# Altium PCB PCB1.PcbDoc
Units mil, origin at the board's own origin, x right, y up, seen from the top; angles counter-clockwise.
Board outline 4075 x 3830 mil, 2 copper layers (Top Layer, Bottom Layer); 91 components, 64 nets, 396 pads, 22 vias.
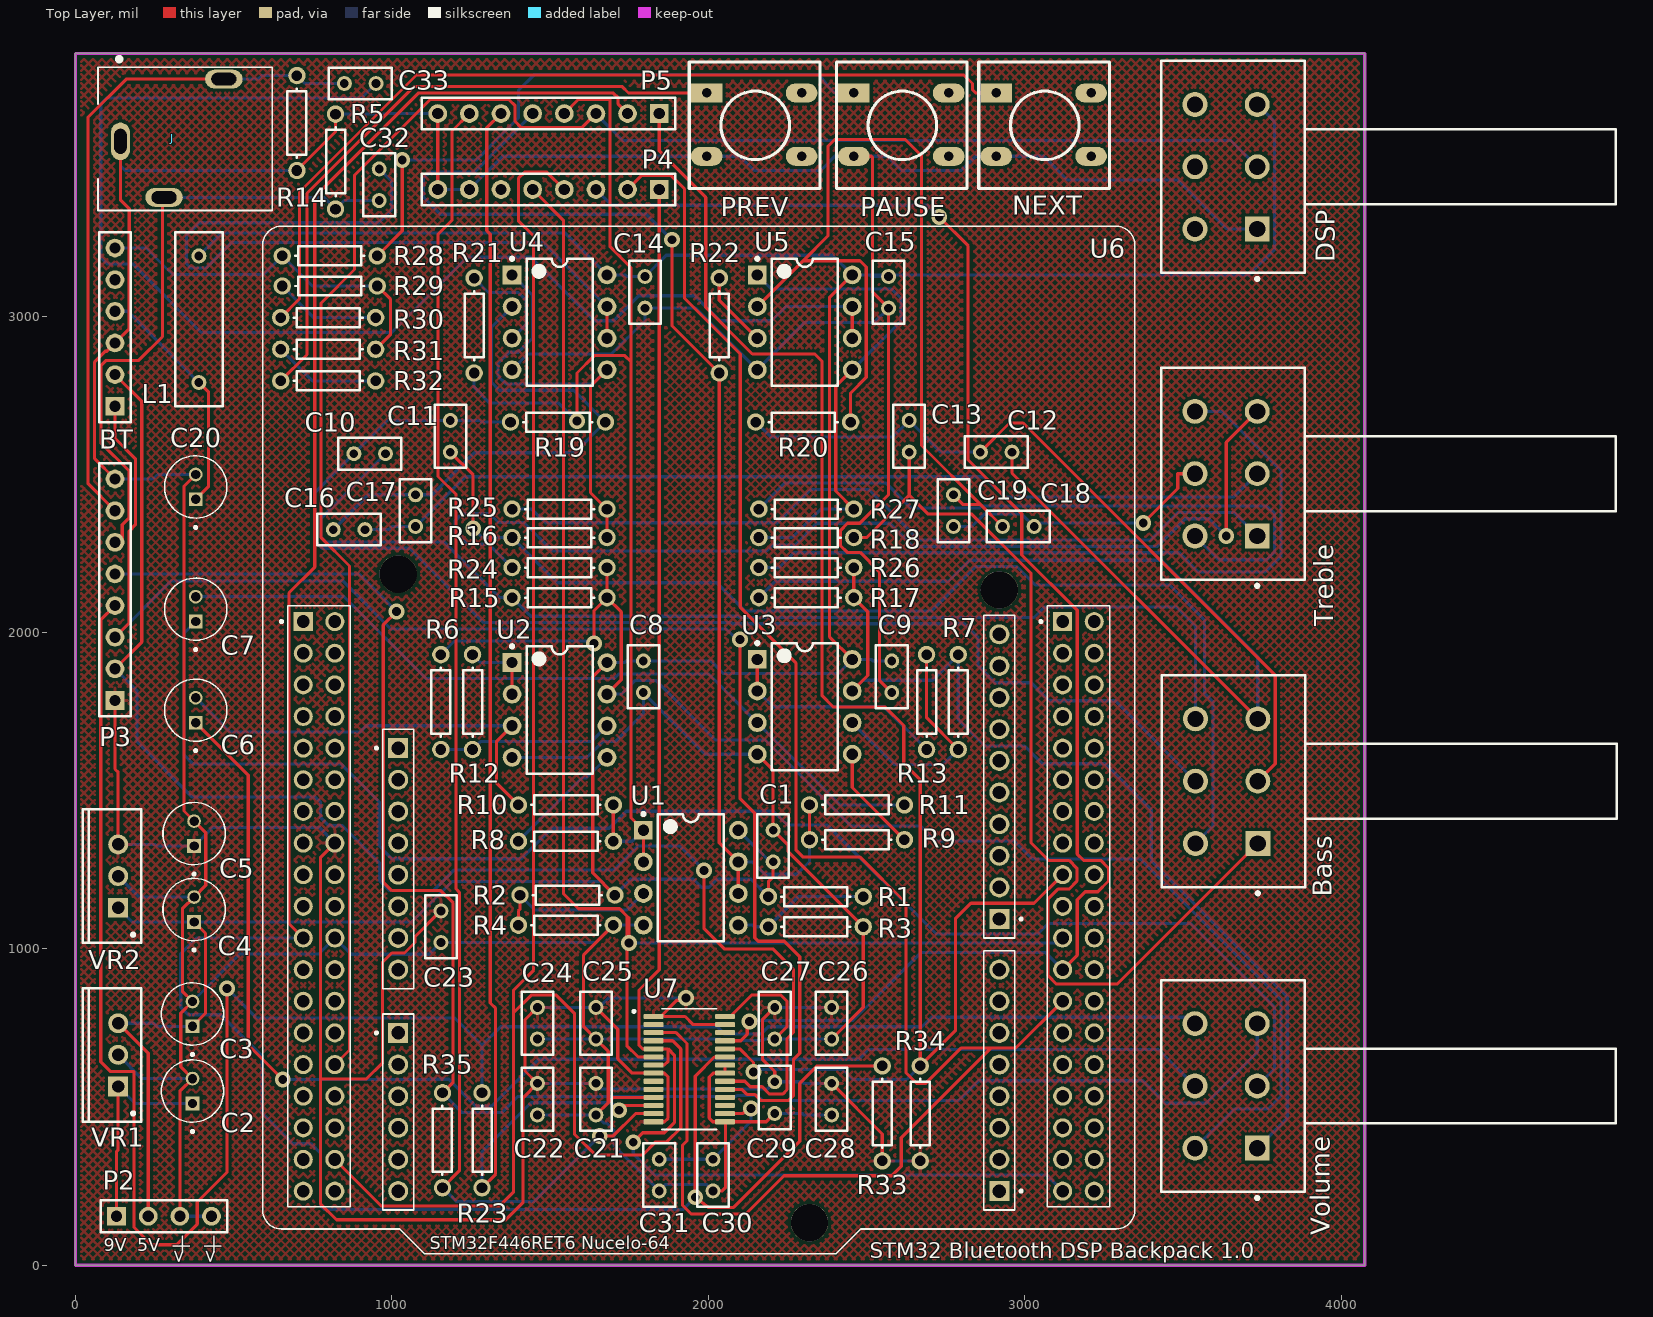
[diagram p0: Top Layer view]
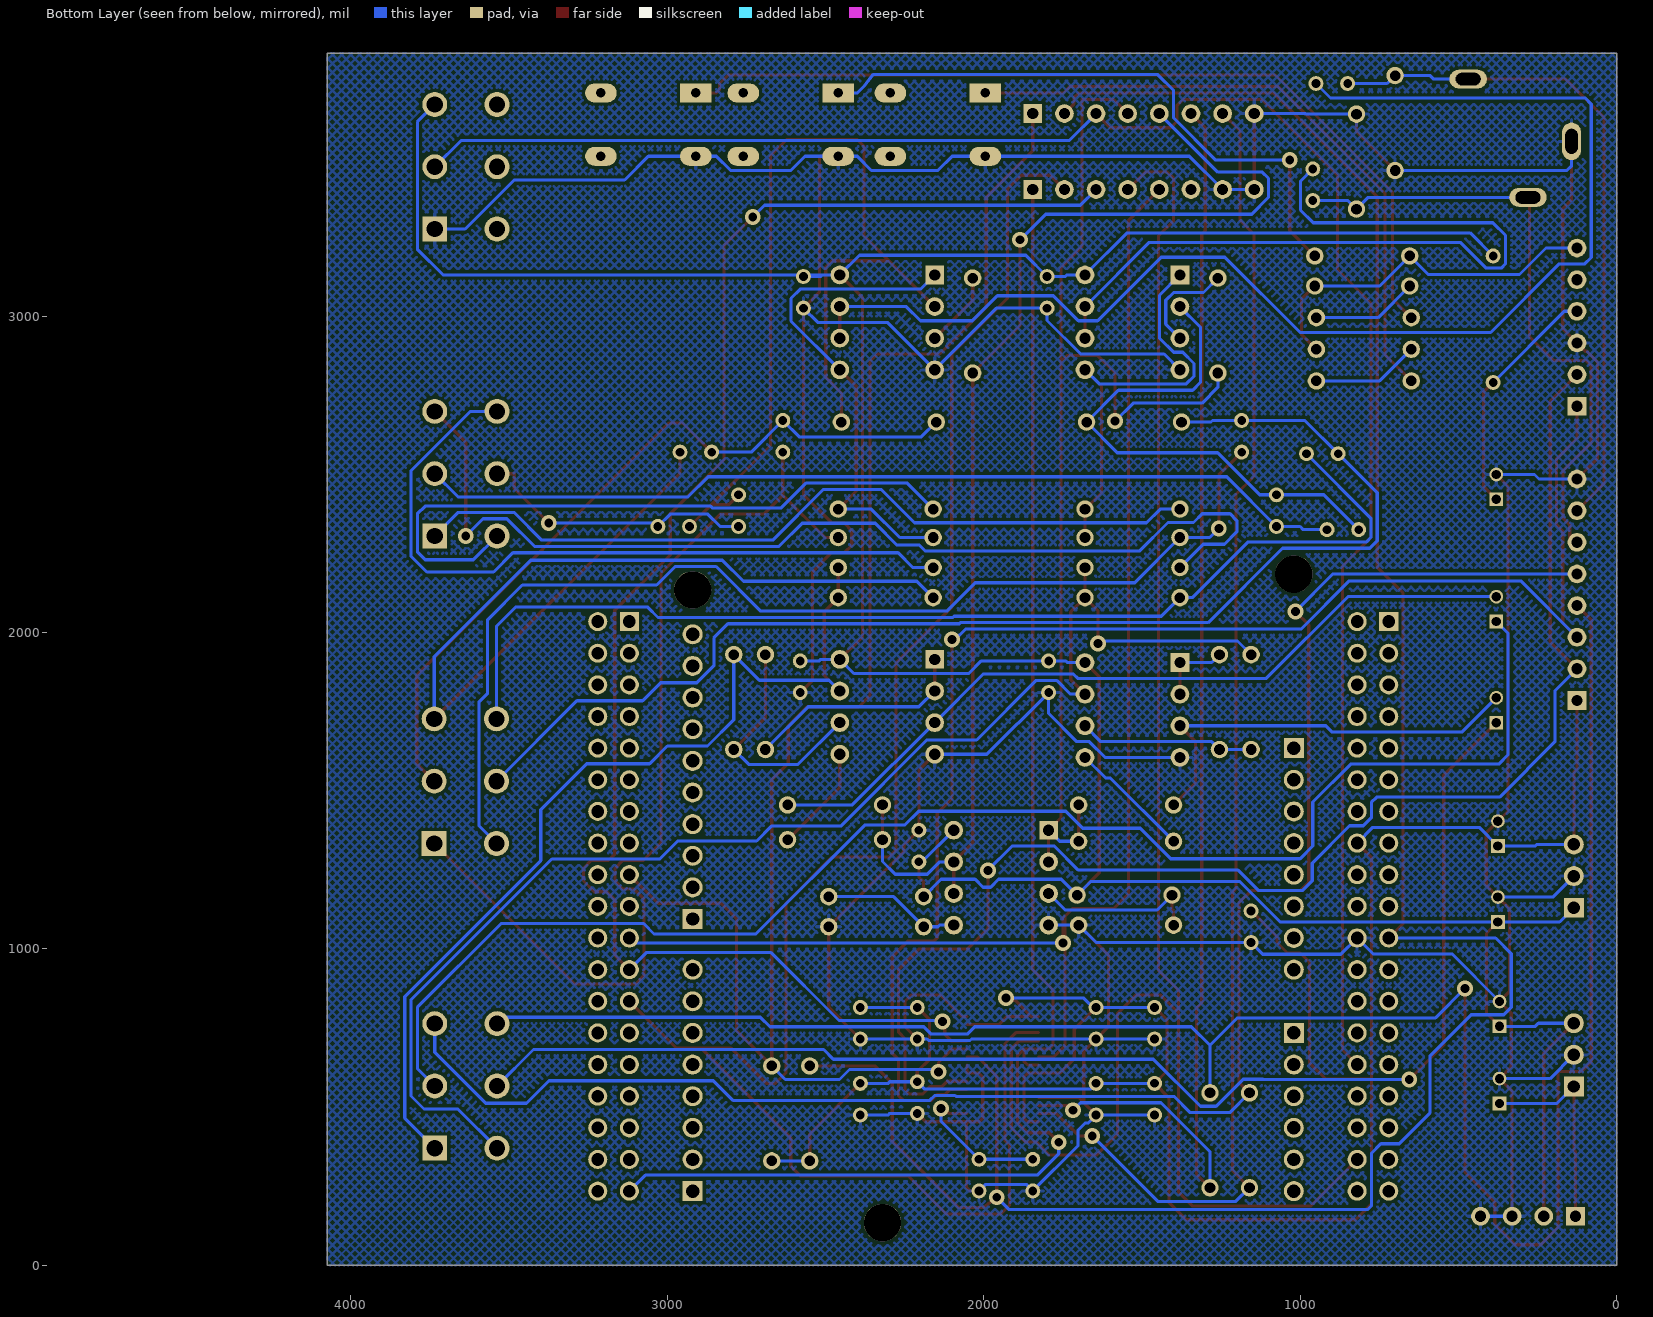
[diagram p1: Bottom Layer view, seen from below]

## Layer stack, top to bottom
Top Solder: solder mask 0.4, Solder Resist, Dk 3.5
Top Layer: signal copper 1.4
Dielectric 1: dielectric 12.6, FR-4, Dk 4.8
Bottom Layer: signal copper 1.4
Bottom Solder: solder mask 0.4, Solder Resist, Dk 3.5

## Board outline
0,0 0,3830 4075,3830 4075,0

## Design rules (kind name [scope] priority, off if disabled: settings)
Clearance [All] p1: gap=10 ignorepadtopadclearanceinfootprint=FALSE except(0: Arc-Hole Track-Hole SMDPad-Hole THPad-Hole Via-Hole Fill-Hole Poly-Hole Region-Hole Text-Hole)
PolygonConnect [All] p1: connectstyle=Relief reliefconductorwidth=10 reliefentries=4 polygonreliefangle="90 Angle" airgapwidth=10
RoutingVias [All] p1: holewidth=28 width=50 viastyle="Through Hole" minholewidth=28 minwidth=50 maxholewidth=28 maxwidth=50
SolderMaskExpansion [All] p1: expansion=4 istentingtop=FALSE
Width [All] p1: maxlimit=10 minlimit=10 preferedwidth=10
30 further rules are at their usual default settings.

## Classes and differential pairs
component class Volume_Tone_Control: Bass C6 C7 C8 C9 C10 C11 C12 C13 C14 C15 C16 C17 C18 C19 C32 C33 J R5 R6 R7 R8 R9 R10 R11 R12 R13 R14 R15 R16 R17 R18 R19 R20 R21 R22 R23 R24 R25 R26 R27 Treble U2 U3 U4 U5 Volume
component class Power: C1 C2 C3 C4 C5 P2 R1 R2 R3 R4 U1 VR1 VR2
component class Digital: BT C20 C21 C22 C23 C24 C25 C26 C27 C28 C29 C30 C31 DSP L1 NEXT P3 P4 P5 PAUSE PREV R28 R29 R30 R31 R32 R33 R34 U6 U7

## Components (designator, comment, footprint, x,y, rotation, side; value= is the part's Value field where it differs from the comment)
Bass "BASS_100K" Bourns_PDB182-K425K-103A_0 4152.2,1530 r90 top
BT "MH-M18" HDR1X6 125,2715 r90 top
C1 "Cap" RAD-0.1 2205,1325 r90 top value=0.1uF
C2 "1uF" CAPPRD200W50D500H1500 370,550.63 r90 top
C3 "1uF" CAPPRD200W50D500H1500 370,794.37 r90 top
C4 "0.47uF" CAPPRD200W50D500H1500 375,1124.37 r90 top
C5 "47uF" CAPPRD200W50D500H1500 375,1364.37 r90 top
C6 "10uF" CAPPRD200W50D500H1500 380,1754.37 r90 top
C7 "10uF" CAPPRD200W50D500H1500 380,2073.78 r90 top
C8 "Cap" RAD-0.1 1795,1860 r270 top value=0.1uF
C9 "Cap" RAD-0.1 2580,1860 r270 top value=0.1uF
C10 "Cap" RAD-0.1 930,2565 r180 top value=47nF
C11 "Cap" RAD-0.1 1185,2620 r90 top value=47nF
C12 "Cap" RAD-0.1 2910,2570 r180 top value=47nF
C13 "Cap" RAD-0.1 2635,2620 r90 top value=47nF
C14 "Cap" RAD-0.1 1800,3075 r270 top value=0.1uF
C15 "Cap" RAD-0.1 2570,3075 r270 top value=0.1uF
C16 "Cap" RAD-0.1 865,2325 r180 top value=100pF
C17 "Cap" RAD-0.1 1075,2385 r90 top value=470pF
C18 "Cap" RAD-0.1 2980,2335 r180 top value=100pF
C19 "Cap" RAD-0.1 2775,2385 r90 top value=470pF
C20 "10uF" CAPPRD200W50D500H1500 380,2460 r90 top
C21 "Cap" RAD-0.1 1645,525 r270 top value=10uF
C22 "Cap" RAD-0.1 1460,525 r270 top value=0.1uF
C23 "Cap" RAD-0.1 1155,1070 r270 top value=0.1uF
C24 "Cap" RAD-0.1 1460,765 r270 top value=10uF
C25 "Cap" RAD-0.1 1645,765 r270 top value=0.1uF
C26 "Cap" RAD-0.1 2390,765 r270 top value=10uF
C27 "Cap" RAD-0.1 2210,765 r90 top value=0.1uF
C28 "Cap" RAD-0.1 2390,525 r270 top value=10uF
C29 "Cap" RAD-0.1 2210,530 r90 top value=0.1uF
C30 "Cap" RAD-0.1 2015,285 r90 top value=10uF
C31 "Cap" RAD-0.1 1845,285 r90 top value=0.1uF
C32 "Cap" RAD-0.1 960,3415 r90 top value=2.2uF
C33 "Cap" RAD-0.1 900,3735 r0 top value=2.2uF
DSP "ADC_100K" Bourns_PDB182-K425K-103A_0 4150.35,3471.85 r90 top
J "SJ1-3513N" CUI_SJ1-3513N 142.2,3552.17 r0 top
L1 "Inductor" RAD-0.4 390,2990 r90 top value=330uH
NEXT "NEXT" "SW PB" 2910,3705 r0 top
P2 "Power" HDR1X4 130,155 r0 top
P3 "ANALOG" HDR1X8 125,1785 r90 top
P4 "SAI" HDR1X8 1845,3400 r180 top
P5 "MISC" HDR1X8 1845,3640 r180 top
PAUSE "PAUSE" "SW PB" 2460,3705 r0 top
PREV "PREV" "SW PB" 1995,3705 r0 top
R1 "Res1" AXIAL-0.3 2340,1165 r180 top value=1K
R2 "Res1" AXIAL-0.3 1555,1170 r0 top value=1K
R3 "Res1" AXIAL-0.3 2340,1070 r180 top value=1K
R4 "Res1" AXIAL-0.3 1550,1075 r180 top value=1K
R5 "Res1" AXIAL-0.3 821.98,3488.12 r90 top value=10k
R6 "Res1" AXIAL-0.3 1155,1780 r90 top value=8.2k
R7 "Res1" AXIAL-0.3 2790,1780 r90 top value=8.2k
R8 "Res1" AXIAL-0.3 1550,1340 r180 top value=2.2k
R9 "Res1" AXIAL-0.3 2470,1345 r0 top value=2.2k
R10 "Res1" AXIAL-0.3 1550,1455 r180 top value=22k
R11 "Res1" AXIAL-0.3 2470,1455 r0 top value=22k
R12 "Res1" AXIAL-0.3 1255,1780 r270 top value=2.2k
R13 "Res1" AXIAL-0.3 2690,1780 r90 top value=2.2k
R14 "Res1" AXIAL-0.3 700,3610 r270 top value=10k
R15 "Res1" AXIAL-0.3 1530,2110 r180 top value=22k
R16 "Res1" AXIAL-0.3 1530,2300 r0 top value=22k
R17 "Res1" AXIAL-0.3 2310,2110 r180 top value=22k
R18 "Res1" AXIAL-0.3 2310,2300 r180 top value=22k
R19 "Res1" AXIAL-0.3 1525,2665 r180 top value=22k
R20 "Res1" AXIAL-0.3 2300,2665 r180 top value=22k
R21 "Res1" AXIAL-0.3 1260,2970 r90 top value=2.2k
R22 "Res1" AXIAL-0.3 2035,2970 r90 top value=2.2k
R23 "Res1" AXIAL-0.3 1285,395 r90 top value=0R
R24 "Res1" AXIAL-0.3 1530,2205 r180 top value=10k
R25 "Res1" AXIAL-0.3 1530,2390 r180 top value=10k
R26 "Res1" AXIAL-0.3 2310,2205 r180 top value=10k
R27 "Res1" AXIAL-0.3 2310,2390 r180 top value=10k
R28 "Res1" AXIAL-0.3 803.74,3190 r0 top value=47k
R29 "Res1" AXIAL-0.3 803.74,3095 r180 top value=22k
R30 "Res1" AXIAL-0.3 798.74,2995 r180 top value=10k
R31 "Res1" AXIAL-0.3 798.74,2895 r180 top value=4.7k
R32 "Res1" AXIAL-0.3 798.74,2795 r180 top value=4.7k
R33 "Res1" AXIAL-0.3 2550,480 r270 top value=4.7k
R34 "Res1" AXIAL-0.3 2670,480 r270 top value=4.7k
R35 "Res1" AXIAL-0.3 1160,395 r90 top value=0R
Treble "TREBLE_100K" Bourns_PDB182-K425K-103A_0 4150.35,2501.85 r90 top
U1 "NE5532P" TI-P8 1945,1225 r0 top
U2 "NE5532P" TI-P8 1530,1755 r0 top
U3 "NE5532P" TI-P8 2305,1765 r0 top
U4 "NE5532P" TI-P8 1530,2980 r0 top
U5 "NE5532P" TI-P8 2305,2980 r0 top
U6 "NUCLEO-F446RE" MODULE_NUCLEO-F446RE 1970,1660 r0 top locked
U7 "TLV320AIC23BPW" SOP65P640X120-28N 1940,620 r0 top
Volume "VOLUME_100K" Bourns_PDB182-K425K-103A_0 4150.35,566.85 r90 top locked
VR1 "LM7805CV" T03B 135,665 r90 top
VR2 "LM3940" T03B 135,1230 r90 top

## Footprints (in the part's own frame and the unit in brackets; to place one, negate y for a bottom-side part, rotate by r counter-clockwise, add the part's x,y. Pads: shape width x height; smd on the part's side, far side on the other; paste and mask are expansions set on the pad)
AXIAL-0.3 [mm] "Axial Device, Thru-Hole; 2 Leads; 0.3 in Pin Spacing"
  round 1.4 hole 0.85: 1(-3.81,0) 2(3.81,0)
  silkscreen extent -2.77,-0.76 2.77,0.76
Bourns_PDB182-K425K-103A_0 [mm]
  rect 2x2 hole 1.3 paste-1000 mask+0: 1(-5,10.55)
  round 2 hole 1.3 paste-1000 mask+0: 2(0,10.55) 3(5,10.55) 4(-5,15.55) 5(0,15.55) 6(5,15.55)
  silkscreen extent -9.12,-18.25 8.5,18.25, body extent -8.6,-18.85 8.6,18.35, height 0.25
CAPPRD200W50D500H1500 [mm]
  round 1.1 hole 0.75: N(1,0)
  rect 1.1x1.1 hole 0.75: P(-1,0)
  silkscreen extent -3.35,-2.5 2.5,2.5, body extent -2.5,-2.5 2.5,2.5, height 15
CUI_SJ1-3513N [mm]
  oval 1.508x3.016 hole 1 slot 2 at 90 deg: 1(0,0)
  oval 3.016x1.508 hole 1 slot 2 at 0 deg: 2(3.5,-4.5) 3(8.3,5)
  silkscreen extent -1.8,-5.55 12.2,6.77
HDR1X4 [mm] "Connector; Header; 4 Position"
  rect 1.5x1.5 hole 0.9: 1(0,0)
  round 1.5 hole 0.9: 2(2.54,0) 3(5.08,0) 4(7.62,0)
  silkscreen extent -1.27,-1.27 8.89,1.27
HDR1X6 [mm] "Connector; Header; 6 Position"
  rect 1.5x1.5 hole 0.9: 1(0,0)
  round 1.5 hole 0.9: 2(2.54,0) 3(5.08,0) 4(7.62,0) 5(10.16,0) 6(12.7,0)
  silkscreen extent -1.27,-1.27 13.97,1.27
HDR1X8 [mm] "Connector; Header; 8 Position"
  rect 1.5x1.5 hole 0.9: 1(0,0)
  round 1.5 hole 0.9: 2(2.54,0) 3(5.08,0) 4(7.62,0) 5(10.16,0) 6(12.7,0) 7(15.24,0) 8(17.78,0)
  silkscreen extent -1.27,-1.27 19.05,1.27
MODULE_NUCLEO-F446RE [mm]
  rect 1.605x1.605 hole 1.07: CN5_1(24.13,-14.37) CN6_1(-24.13,-0.65) CN8_1(-24.13,-23.51) CN9_1(24.13,-36.21)
  round 1.605 hole 1.07: CN5_2(24.13,-11.83) CN5_3(24.13,-9.29) CN5_4(24.13,-6.75) CN5_5(24.13,-4.21) CN5_6(24.13,-1.67) CN5_7(24.13,0.87) CN5_8(24.13,3.41) CN5_9(24.13,5.95) CN5_10(24.13,8.49) CN6_2(-24.13,-3.19) CN6_3(-24.13,-5.73) CN6_4(-24.13,-8.27) CN6_5(-24.13,-10.81) CN6_6(-24.13,-13.35) CN6_7(-24.13,-15.89) CN6_8(-24.13,-18.43) CN8_2(-24.13,-26.05) CN8_3(-24.13,-28.59) CN8_4(-24.13,-31.13) CN8_5(-24.13,-33.67) CN8_6(-24.13,-36.21) CN9_2(24.13,-33.67) CN9_3(24.13,-31.13) CN9_4(24.13,-28.59) CN9_5(24.13,-26.05) CN9_6(24.13,-23.51) CN9_7(24.13,-20.97) CN9_8(24.13,-18.43)
  rect 1.53x1.53 hole 1.02: CN7_1(-31.75,9.51) CN10_1(29.21,9.51)
  round 1.53 hole 1.02: CN7_2(-29.21,9.51) CN7_3(-31.75,6.97) CN7_4(-29.21,6.97) CN7_5(-31.75,4.43) CN7_6(-29.21,4.43) CN7_7(-31.75,1.89) CN7_8(-29.21,1.89) CN7_9(-31.75,-0.65) CN7_10(-29.21,-0.65) CN7_11(-31.75,-3.19) CN7_12(-29.21,-3.19) CN7_13(-31.75,-5.73) CN7_14(-29.21,-5.73) CN7_15(-31.75,-8.27) CN7_16(-29.21,-8.27) CN7_17(-31.75,-10.81) CN7_18(-29.21,-10.81) CN7_19(-31.75,-13.35) CN7_20(-29.21,-13.35) CN7_21(-31.75,-15.89) CN7_22(-29.21,-15.89) CN7_23(-31.75,-18.43) CN7_24(-29.21,-18.43) CN7_25(-31.75,-20.97) CN7_26(-29.21,-20.97) CN7_27(-31.75,-23.51) CN7_28(-29.21,-23.51) CN7_29(-31.75,-26.05) CN7_30(-29.21,-26.05) CN7_31(-31.75,-28.59) CN7_32(-29.21,-28.59) CN7_33(-31.75,-31.13) CN7_34(-29.21,-31.13) CN7_35(-31.75,-33.67) CN7_36(-29.21,-33.67) CN7_37(-31.75,-36.21) CN7_38(-29.21,-36.21) CN10_2(31.75,9.51) CN10_3(29.21,6.97) CN10_4(31.75,6.97) CN10_5(29.21,4.43) CN10_6(31.75,4.43) CN10_7(29.21,1.89) CN10_8(31.75,1.89) CN10_9(29.21,-0.65) CN10_10(31.75,-0.65) CN10_11(29.21,-3.19) CN10_12(31.75,-3.19) CN10_13(29.21,-5.73) CN10_14(31.75,-5.73) CN10_15(29.21,-8.27) CN10_16(31.75,-8.27) CN10_17(29.21,-10.81) CN10_18(31.75,-10.81) CN10_19(29.21,-13.35) CN10_20(31.75,-13.35) CN10_21(29.21,-15.89) CN10_22(31.75,-15.89) CN10_23(29.21,-18.43) CN10_24(31.75,-18.43) CN10_25(29.21,-20.97) CN10_26(31.75,-20.97) CN10_27(29.21,-23.51) CN10_28(31.75,-23.51) CN10_29(29.21,-26.05) CN10_30(31.75,-26.05) CN10_31(29.21,-28.59) CN10_32(31.75,-28.59) CN10_33(29.21,-31.13) CN10_34(31.75,-31.13) CN10_35(29.21,-33.67) CN10_36(31.75,-33.67) CN10_37(29.21,-36.21) CN10_38(31.75,-36.21)
  round 3 hole 3 unplated: ""(-24.13,13.32) ""(8.89,-38.75) ""(24.13,12.05)
  silkscreen extent -35,-41.25 35,41.25
RAD-0.1 [mm] "Radial Cap, Thru-Hole; 2 Leads; 0.1 in Pin Spacing"
  round 1.2 hole 0.7: 1(-1.27,0) 2(1.27,0)
  silkscreen extent -2.54,-1.27 2.54,1.27
RAD-0.4 [mm] "Radial Cap, Thru-Hole; 2 Leads; 0.4 in Pin Spacing"
  round 1.2 hole 0.7: 1(-5.08,0) 2(5.08,0)
  silkscreen extent -6.98,-1.91 6.98,1.91
SOP65P640X120-28N [mm]
  rrect25% 1.57x0.41 smd: 1(-2.87,4.225) 2(-2.87,3.575) 3(-2.87,2.925) 4(-2.87,2.275) 5(-2.87,1.625) 6(-2.87,0.975) 7(-2.87,0.325) 8(-2.87,-0.325) 9(-2.87,-0.975) 10(-2.87,-1.625) 11(-2.87,-2.275) 12(-2.87,-2.925) 13(-2.87,-3.575) 14(-2.87,-4.225) 15(2.87,-4.225) 16(2.87,-3.575) 17(2.87,-2.925) 18(2.87,-2.275) 19(2.87,-1.625) 20(2.87,-0.975) 21(2.87,-0.325) 22(2.87,0.325) 23(2.87,0.975) 24(2.87,1.625) 25(2.87,2.275) 26(2.87,2.925) 27(2.87,3.575) 28(2.87,4.225)
  silkscreen extent -4.54,-4.85 2.2,4.85
"SW PB" [mil]
  rect 100x60 hole 30: 1(0,0)
  oval 100x60 hole 30: 2(0,-200) 3(300,-200) 4(300,0)
  silkscreen extent -55,-302 358,98
T03B [mm]
  rect 1.6x1.6 hole 1: 1(-2.54,0)
  round 1.6 hole 1: 2(0,0) 3(2.54,0)
  silkscreen extent -5.35,-1.85 5.35,2.85, body extent -5.4,-1.9 5.4,2.9, height 19.4
TI-P8 [mm] "DIP, 8-Leads, Body 9.59x6.35mm, Pitch 2.54mm"
  rect 1.5x1.5 hole 0.9: 1(-3.81,3.81)
  round 1.5 hole 0.9: 2(-3.81,1.27) 3(-3.81,-1.27) 4(-3.81,-3.81) 5(3.81,-3.81) 6(3.81,-1.27) 7(3.81,1.27) 8(3.81,3.81)
  silkscreen extent -3.93,-5.1 2.65,5.23, body extent -3.95,-5.07 3.95,5.07, height 5.08

## Part data
Bass DSP Treble Volume: library part PDB182-K420K-103A2, "No Description Available", Mfr_Name="Bourns Electronics", Copyright="Copyright (C) 2022 Ultra Librarian. All rights reserved.", Manufacturer_Part_Number=PDB182-K420K-103A2, RefDes=RefDes, Type=DEV
BT: library part "Header 6", "Header, 6-Pin", LatestRevisionDate=17-Jul-2002, LatestRevisionNote="Re-released for DXP Platform.", Publisher="Altium Limited"
C1 C8 C9 C10 C11 C12 C13 C14 C15 C16 C17 C18 C19 C21 C22 C23 C24 C25 C26 C27 C28 C29 C30 C31 C32 C33: "Capacitor", LatestRevisionDate=17-Jul-2002, LatestRevisionNote="Re-released for DXP Platform.", PackageDescription="Radial Cap, Thru-Hole; 2 Leads; 0.3 in Pin Spacing", PackageReference=RAD-0.3, Published=8-Jun-2000, Publisher="Altium Limited"
C2 C3 C4 C5: library part EEUEB1J1R0, "1F 63V Aluminum Electrolytic Capacitors Radial, Can 5000 Hrs @ 105C", Package="RADIAL-2 Panasonic", Availability="Not in stock", Check_prices=https://www.snapeda.com/parts/EEU-EB1J1R0/Panasonic/view-part/6221748/?ref=eda, MF="Panasonic Electronic Components", MP=EEU-EB1J1R0, Price=None, SnapEDA_Link=https://www.snapeda.com/parts/EEU-EB1J1R0/Panasonic/view-part/6221748/?ref=snap
C6 C7 C20: library part EEUFC1J101, "Capacitor; Aluminum Electrolytic; Radial Al Electrolytic Cap; 100uF 63V", Package="RADIAL-2 Panasonic", Availability="In Stock", Check_prices=https://www.snapeda.com/parts/EEU-FC1J101/Panasonic%20Electronic%20Components/view-part/494707/?ref=eda, MF="Panasonic Electronic", MP=EEU-FC1J101, Price=None, SnapEDA_Link=https://www.snapeda.com/parts/EEU-FC1J101/Panasonic%20Electronic%20Components/view-part/494707/?ref=snap
J: "3.5 mm, Stereo, Right Angle, Through Hole, Audio Jack Connector", Package=None, Availability=Unavailable, CUI_purchase_URL=https://www.cuidevices.com/product/interconnect/connectors/audio-connectors/jacks/sj1-351xn-series?utm_source=snapeda.com&utm_medium=referral&utm_campaign=snapedaBOM, MF="CUI Devices", MP=SJ1-3513N, Price=None, SnapEDA_Link=https://www.snapeda.com/parts/SJ1-3513N/CUI%20Devices/view-part/617507/?ref=snap
NEXT PAUSE PREV: library part SW-PB, "Switch", LatestRevisionDate=17-Jul-2002, LatestRevisionNote="Re-released for DXP Platform.", PackageDescription="Switch; 2 Leads", PackageReference=SPST-2, Published=24-Mar-1999, Publisher="Altium Limited"
P2: library part "Header 4", "Header, 4-Pin", LatestRevisionDate=17-Jul-2002, LatestRevisionNote="Re-released for DXP Platform.", Publisher="Altium Limited"
P3 P4 P5: library part "Header 8", "Header, 8-Pin", LatestRevisionDate=17-Jul-2002, LatestRevisionNote="Re-released for DXP Platform.", Publisher="Altium Limited"
R1 R2 R3 R4 R5 R6 R7 R8 R9 R10 R11 R12 R13 R14 R15 R16 R17 R18 R19 R20 R21 R22 R23 R24 R25 R26 R27 R28 R29 R30 R31 R32 R33 R34 R35: "Resistor", LatestRevisionDate=17-Jul-2002, LatestRevisionNote="Re-released for DXP Platform.", PackageDescription="Axial Device, Thru-Hole; 2 Leads; 0.3 in Pin Spacing", PackageReference=AXIAL-0.3, Published=8-Jun-2000, Publisher="Altium Limited"
U1 U2 U3 U4 U5: "Dual Low-Noise High-Speed Audio Operational Amplifier, 10 to 30 V, 0 to 70 degC, 8-pin DIP (P8), Pb-Free (RoHS)", Manufacturer="Texas Instruments", Total Supply Voltage(Max)(+5V is 5, +/-5V is 10)=30, Total Supply Voltage(Min)(+5V is 5, +/-5V is 10)=10, CMRR(Min)(dB)=70, Code_JEDEC=MS-001, ComponentLink1Description="Manufacturer URL", ComponentLink1URL=http://www.ti.com/, ComponentLink2Description=Datasheet, ComponentLink2URL=http://www.ti.com/lit/ds/symlink/ne5532.pdf, ComponentLink3Description="Package Specification", ComponentLink3URL=http://www.ti.com/litv/pdf/mpdi001b, DatasheetVersion=SLOS075I, Eco-Plan="Pb-Free (RoHS)", GBW(Typ)(MHz)=10, IIB(Max)(pA)=800000, Iq per channel(Max)(mA)=4, Mounting Technology="Through Hole", Number of Channels=2, PackageDescription="8-Pin Plastic In-Line, Body 9.59 x 6.35 mm, Pitch 2.54 mm", PackageReference=P8, PackageVersion="4040082/E, 04/2010", PartNumber=NE5532P, Slew Rate(Typ)(V/us)=9, Sub Family="General Purpose Amplifier, High Supply Voltage Amplifier (>=30V), Low Noise Amp (<=10nV/rtHz)", Vio (25C)(Max)(mV)=4, Vn at 1kHz(Typ)(nV/rtHz)=5
U6: "STM32 Nucleo-64 development board with STM32F446RET6 MCU, supports Arduino and ST morpho connectivity", Package=None, Availability=Unavailable, MP=NUCLEO-F446RE, Price=None
U7: "Low-Power Stereo CODEC with HP Amplifier 28-TSSOP -10 to 70", Package="TSSOP-28 Texas Instruments", Arrow_Electronics-Purchase-URL=https://snapeda.com/shop?store=Arrow+Electronics&id=249064, Availability=Warning, DigiKey-Purchase-URL=https://snapeda.com/shop?store=DigiKey&id=249064, MF="Texas Instruments", Mouser-Purchase-URL=https://snapeda.com/shop?store=Mouser&id=249064, MP=TLV320AIC23BPW, Price=None, SnapEDA_Link=https://www.snapeda.com/parts/TLV320AIC23BPW/Texas%20Instruments/view-part/249064/?ref=snap, Texas_Instruments-Purchase-URL=https://snapeda.com/shop?store=Texas+Instruments&id=249064
VR1 VR2: library part "Volt Reg", "Voltage Regulator", LatestRevisionDate=29-May-2009, LatestRevisionNote="IPC-7351 Footprint Added.", PackageDescription="3-Pin Transistor Outline Package 2.54 mm Pitch, 15.1 mm Lead Span", PackageReference=D2PAK, Published=24-Mar-1999, Publisher="Altium Limited"
L1: Code_IEC=1005, Code_JEITA=0402, LatestRevisionDate=29-May-2009, LatestRevisionNote="IPC-7351 Footprint Added.", PackageDescription="Chip Inductor", PackageReference=0402-A, Published=8-Jun-2000, Publisher="Altium Limited"

## Via types
v1: diameter 50, hole 28, Top Layer to Bottom Layer, 22 vias

## Nets (pads, with @x,y where several pads share a name; then routed paths per layer and width w, separated by ;. In a path a pad name is that pad's centre, name@x,y a point inside that pad or via, vN(x,y) a via of type N, cw(c..) or ccw(c..) an arc to the next point about the centre after c; other vN are vias at no path point)
3V3: C5.P C21.1 C22.1 C23.1 C24.1 C25.1 C26.1 C27.2 C28.1 C29.2 P3.1 R33.2 R34.2 U6.CN7_16 U7.1 U7.8 U7.14 U7.27 VR2.3 | length 7694.6
  Top Layer w10: P3.1 125,1568 135,1558 VR2.3 ; U6.CN7_16 774,1288.41 774,589 ; C23.1 1073.17,1038.17 1073.17,1020.17 1040,987 1000,987 970,957 970,639 920,589 774,589 ; C24.1 1421,776 1421,614 C22.1 1415,530 1415,199 1360,144 825,144 774,195 774,589 ; C25.1 1714,746 1714,653.2 1760,607.2 U7.8 1860.8,607.2 1873,595 1873,465 1861.66,453.66 U7.14 ; U7.1 1849.84,786.34 1900.85,837.35 1922.35,837.35 v1(1930,845) ; 1860,786.34 1927,786.34 1952.59,760.75 U7.27 ; C29.2 2210,612.38 2171,651.38 2171,776 C27.2 ; C28.1 2550,415 R33.2
  Bottom Layer w10: VR2.3 252,1330 257,1325 C5.P 434,1384 770.41,1384 U6.CN7_16 ; C22.1 C21.1 1663.27,556.73 2186.73,556.73 C29.2 2297,580 2302,575 C28.1 ; C24.1 C25.1 1654.93,815 1684.93,845 v1(1930,845) ; C27.2 C26.1 ; R33.2 R34.2
5V: C1.1 C3.P C4.P C8.1 C9.1 C14.1 C15.1 DSP.3 L1.2 P2.2 R1.2 R2.2 U1.8 U2.8 U3.8 U4.8 U5.8 VR1.3 VR2.1 | length 10840.1
  Top Layer w10: VR1.3 230,670 P2.2 ; C3.P 411,796 411,1049 C4.P ; U2.8 1635,1860 1635,1240 R2.2 ; R1.2 2190,1212 2205,1227 C1.1 ; U3.8 2383,1987 2383,3058 U5.8
  Bottom Layer w10: VR1.3 247,765 257,755 C3.P ; VR2.1 180,1085 C4.P 1063,1085 1191,1213 1662,1213 R2.2 1755,1220 1953.37,1220 1978.37,1195 2002.37,1195 2027.37,1220 2135,1220 R1.2 ; L1.2 463,3263 1547,3263 U4.8 1737,3130 1742,3125 C14.1 1867.3,3192.3 2392.7,3192.3 U5.8 2510,3130 ; U2.8 1736.38,1905 1741.38,1910 C8.1 2007.47,1910 2047,1870.47 2410.47,1870.47 U3.8 2515,1915 2520,1910 C9.1 ; U1.8 2195,1275 C1.1 ; C15.1 2515,3125 2510,3130 ; DSP.3 3790,3613.7 3790,3211 3709,3130 2510,3130
9V: C2.P P2.1 VR1.1 | length 669.3
  Top Layer w10: P2.1 130,360 135,365 VR1.1
  Bottom Layer w10: VR1.1 188.74,511.26 C2.P
BASS_POT_IN: Bass.3 C12.1 R17.2 | length 3113.6
  Top Layer w10: C12.1 2960,2503.7 Bass.3
  Bottom Layer w10: R17.2 2212,2162 2759.48,2162 2825.94,2228.47 3431.53,2228.47 3736.85,1923.15 Bass.3
BASS_POT_OUT: Bass.1 C13.1 R18.1 | length 3139.9
  Top Layer w10: R18.1 2500.93,2300 2635,2434.07 ; C13.1 2635,2434.07 ; Bass.1 3292.7,889 3100,889 3074,915 3074,1158 3105,1189 3140,1189 3165.12,1214.12 3165.12,1255 3140.59,1279.53 3075.47,1279.53 3020,1335 3020,2187 2833,2374 2695.07,2374 2635,2434.07
BASS_POT_WIPER: Bass.2 C12.2 C13.2 R20.2 | length 2450.5
  Top Layer w10: C12.2 2952,2662 2995,2662 3792,1865 3792,1585.15 Bass.2
  Bottom Layer w10: R20.2 2197,2618 2583,2618 C13.2 2735,2570 C12.2
CODEC_L_OUT: P5.6 R23.1 U7.12 | length 4179
  Top Layer w10: R23.1 1328,288 1328,812 1311,829 1311,3259 1300,3270 1300,3595 P5.6 ; v1(1718,490) 1732.84,504.84 U7.12
  Bottom Layer w10: R23.1 1285,359 1439.62,513.62 1694.38,513.62 v1(1718,490)
CODEC_R_OUT: P5.7 R35.1 U7.13 | length 4285.9
  Top Layer w10: R35.1 1213.62,298.62 1213.62,1178.62 1203,1189.24 1203,2436 1146,2493 1146,3259 1190,3303 1190,3585 P5.7 ; v1(1657,409) 1699.75,409 1770,479.25 U7.13
  Bottom Layer w10: R35.1 1203,202 1450,202 v1(1657,409)
GND: BT.3 C1.2 C2.N C3.N C4.N C5.N C8.2 C9.2 C14.2 C15.2 C20.N C21.2 C22.2 C23.2 C24.2 C25.2 C26.2 C27.1 C28.2 C29.1 C30.1 C31.1 DSP.1 J.1 NEXT.2 P2.3 P2.4 P3.8 P4.7 P4.8 P5.8 PAUSE.2 PREV.2 R3.1 R4.1 R5.2 R14.2 U1.4 U2.4 U3.4 U4.4 U5.4 U6.CN7_22 U7.11 U7.15 U7.21 U7.22 U7.28 VR1.2 VR2.2 | length 19503.8
  Top Layer w10: P3.8 60.47,2549.53 60.47,2855 94.2,2888.72 98.72,2888.72 BT.3 170,2960 170,3339.2 142.2,3367 J.1 ; P2.3 330,550 C2.N 333,627 333,796.74 C3.N 338,865.74 338,1126.74 C4.N 412,1200.74 412,1366.74 C5.N 343,1435.74 343,2462.37 C20.N ; R14.2 821.98,3581.98 R5.2 ; P4.8 P5.8 ; C21.2 1684,514 ; R4.1 1606,981 1606,754 C25.2 1684,676 1684,514 ; U7.11 1700.43,530.43 1684,514 ; C30.1 2044,235 2054,245 U7.15@2054,453.66 ; U7.22 U7.21 2015.2,607.2 2003,595 2003,465 2014.34,453.66 U7.15 U7.15@2054,453.66 ; U7.28 2069,786.34 2136.66,854 2230,854 2249,835 2249,754 C27.1 ; U3.4 2205,1565 C1.2 2252.75,1327.25 2252.75,1307.25 R3.1 2490,815 C26.2 ; C29.1 2183.66,453.66 U7.15@2054,453.66 ; PAUSE.2 2515,3505 2519.53,3500.47 2519.53,3075.47 C15.2 2570,2436 2479,2345 2440,2345 2417,2322 2417,2275 2439,2253 2480,2253 2541,2192 2541,1849 C9.2
  Bottom Layer w10: P3.8 245,2485 259.37,2499.37 C20.N ; VR1.2 210,590 C2.N ; VR2.2 201.26,1163.74 C4.N ; J.1 142.2,3475 157.2,3460 R14.2 ; P2.3 P2.4 ; C3.N 520.26,984 769.59,984 U6.CN7_22 871.41,983 1118,983 C23.2 1645,1020 R4.1 U1.4 ; R5.2 982,3638.12 983.88,3640 P5.8 ; P4.8 P4.7 1350,3505 PREV.2 2100,3505 2145,3460 2355,3460 2400,3505 PAUSE.2 2565,3505 2610,3460 2800,3460 2845,3505 NEXT.2 3060,3505 3135,3430 3484,3430 3639,3275 DSP.1 ; U2.4 1616,1605 1666,1655 1706,1655 1795,1744 C8.2 1990,1615 U3.4 ; U4.4 1430,2880 1694,2880 1800,2986 C14.2 1960,3025 U5.4 2305,2980 2525,2980 C15.2 ; C22.2 C21.2 1670.56,449.44 1680,449.44 1702.18,427.27 1702.18,377.82 C31.1 1865.78,255.78 1994.22,255.78 C30.1 ; C24.2 C25.2 2038.72,715 2043.3,710.42 2174.32,710.42 2178.9,715 C27.1 C26.2 ; C29.1 2297,480 2302,475 C28.2
I2C_SCLK: P5.1 R34.1 U6.CN10_17 U7.24 | length 5169.6
  Top Layer w10: P5.1 1845,3522 1992,3375 1992,3027.38 2139.38,2880 2337,2880 2359,2858 2359,1801 2396,1764 2560,1764 2618,1706 2618,1587 2670,1535 R34.1 2781,741 2781,1095 2830,1144 3029.59,1144 U6.CN10_17 ; U7.24 2100,683.98 2143,640.98 v1(2143,611.38)
  Bottom Layer w10: v1(2143,611.38) 2150.24,618.62 2424.38,618.62 2456,587 2627,587 R34.1
I2C_SD: P5.2 R33.1 U6.CN7_21 U7.23 | length 7641.1
  Top Layer w10: U6.CN7_21 674.88,1079.53 674.88,2125.2 756.38,2206.69 756.38,3377.51 1083.4,3704.53 1700,3704.53 1715,3689.53 1715,3670 P5.2 ; U7.23 2019.39,658.39 1959,598 v1(1959,215) 2000,183 2080,183 2289,392 2289,575 2344,630 R33.1
  Bottom Layer w10: U6.CN7_21 382.41,1034.41 333,985 333,815 356,792 459,792 590,661 590,481 687,384 745,384 774,355 774,189 787,176 1920,176 v1(1959,215)
INPUT_L: BT.2 P3.2 U7.20 | length 4525.4
  Top Layer w10: P3.2 209.53,1969.53 209.53,2730.47 BT.2 ; v1(1987,1248) 1987,1063 2050,1000 2204,1000 2269,935 2269,736 2249,716 2249,555 2235,541 2193.75,541 2170.27,564.48 2132.58,564.48 2115.44,581.61 U7.20
  Bottom Layer w10: P3.2 195,1815 195,1654 369.47,1479.53 758.35,1479.53 774.88,1463 774.88,1414.12 800,1389 844,1389 962,1271 962,1215 993,1184 1131,1184 1196,1249 1701,1249 1777,1325 1910,1325 v1(1987,1248)
INPUT_R: BT.1 P3.3 U7.19 | length 4722.7
  Top Layer w10: P3.3 170,2030 170,2320.47 189.53,2340 189.53,2549.53 125,2614.06 BT.1 ; U7.19 2106,556.02 2122.04,539.98 2146.58,539.98 2165.57,521 2255,521 2269,535 2269,650 2289,670 2289,975 2240,1024 2158,1024 2147,1035 2147,1429 2100,1476 v1(2100,1978)
  Bottom Layer w10: P3.3 303,2163 844.69,2163 996.69,2011 2057.44,2011 2090.44,1978 v1(2100,1978)
MCLK: P4.3 U6.CN10_23 U7.25 | length 5060.7
  Top Layer w10: U7.25 2102.57,709.57 2123.42,730.42 2123.42,763.84 v1(2130,770.42) ; v1(2730,3313) 2821.38,3221.62 2821.38,2545 2991,2375.38 2991,2245 3166,2070 3166,1299.53 3186,1279.53 3240.59,1279.53 3265.12,1255 3265.12,1214.41 3231.24,1180.53 3191.53,1180.53 3166,1155 3166,980.41 U6.CN10_23
  Bottom Layer w10: P4.3 1695,3350 2693,3350 v1(2730,3313) ; v1(2130,770.42) 2133.2,773.62 2457.62,773.62 2672,988 3066.41,988 U6.CN10_23
NetBass_4: Bass.4 C11.1 R16.1 | length 3559.2
  Top Layer w10: C11.1 1257,2498 v1(1257,2329)
  Bottom Layer w10: v1(1257,2329) 1286,2300 R16.1 1523,2157 2027.44,2157 2117,2067.44 2704.97,2067.44 2846,2208.47 2975.53,2208.47 3034,2150 3458,2150 3568,2040 3568,1808 3595,1781 3595,1388.15 Bass.4
NetBass_5: Bass.5 C10.2 C11.2 R19.2 | length 4016.7
  Bottom Layer w10: R19.2 1282,2665 1277,2670 C11.2 985,2670 C10.2 756.38,2441.38 756.38,2290 780,2266.38 1055.62,2266.38 1291,2031 2073.88,2031 2077.44,2027.44 2808.56,2027.44 2853,1983 2853,1895 2907,1841 3021,1841 3078,1784 3286,1784 Bass.5
NetBass_6: Bass.6 C10.1 R15.2 | length 3549.1
  Bottom Layer w10: C10.1 776.38,2361.38 776.38,2300 790,2286.38 1164.41,2286.38 1340.79,2110 R15.2 1439,2051 2093.88,2051 2097.44,2047.44 3029.44,2047.44 3062,2080 3480,2080 3540,2020 Bass.6
NetBT_4: BT.4 C20.P L1.1 | length 757.4
  Top Layer w10: C20.P 421,2461.63 421,2759 L1.1
  Bottom Layer w10: BT.4 165,3015 L1.1
NetBT_6: BT.6 R28.1 R29.1 R31.1 | length 1164.1
  Top Layer w10: R31.1 996,2942.26 996,3052.74 R29.1
  Bottom Layer w10: BT.6 223,3215 306.62,3131.38 595.12,3131.38 R28.1 748.74,3095 R29.1
NetC6_N: C6.N R10.2 U2.3 | length 1352.2
  Top Layer w10: U2.3 1331,1656 1331,1524 R10.2
  Bottom Layer w10: C6.N 488.74,1685 899,1685 919,1705 U2.3
NetC6_P: C6.P Volume.5 | length 4283
  Top Layer w10: C6.P 546,1549 546,696 v1(655,587)
  Bottom Layer w10: v1(655,587) 1116,587 1117,588 1180,588 1265.56,502.44 1315,502.44 1463.94,651.38 2475.38,651.38 2506,682 3423,682 Volume.5
NetC7_N: C7.N R11.2 U3.3 | length 2523.9
  Bottom Layer w10: C7.N 848.85,2113.15 1107,1855 1703.2,1855 1716.82,1868.62 2001.38,1868.62 U3.3 2415,1455 R11.2
NetC16_1: C16.1 C17.1 Treble.2 | length 2946.3
  Bottom Layer w10: C16.1 990,2325 1000,2335 C17.1 1232,2492 2871.29,2492 2935.29,2428 3661.15,2428 Treble.2
NetC16_2: C16.2 C17.2 R19.1 U4.2 | length 1678.9
  Bottom Layer w10: C16.2 925,2435 C17.2 1128,2435 1261,2568 1578,2568 R19.1 1574.53,2765.47 1340,2765.47 1315.47,2790 1315.47,2965.47 U4.2
NetC18_2: C18.2 C19.2 R20.1 U5.2 | length 3019.8
  Top Layer w10: U5.2 2300,3175 ; R20.1 2450,2757 2499.53,2806.53 2499.53,3155 2479.53,3175 2300,3175 ; C19.2 2806,2404 2861,2404 ; C18.2 2861,2404 ; 2300,3175 2378,3253 2378,3536 2400,3558 2623,3558 2674,3507 2674,2591 2861,2404
NetC30_2: C30.2 C31.2 U7.16 | length 468.2
  Top Layer w10: U7.16 2108.43,479.25 2124.18,495 v1(2135,495)
  Bottom Layer w10: C31.2 C30.2 2135,455 v1(2135,495)
NetNEXT_1: NEXT.1 R30.2 | length 2812.1
  Top Layer w10: R30.2 708,3054.26 708,3392 1078,3762 2808,3762 2835,3735 2835,3715 2845,3705 NEXT.1
NetPAUSE_1: PAUSE.1 R28.2 | length 1952.4
  Top Layer w10: R28.2 1033,3269.26 v1(1033,3493)
  Bottom Layer w10: v1(1033,3493) 1267,3493 1400,3626 1400,3713 1450,3763 2350,3763 2378,3727 2400,3705 PAUSE.1
NetPREV_1: PREV.1 R32.2 | length 2038.2
  Top Layer w10: R32.2 732,2878.26 732,3387.71 1069.29,3725 1728,3725 1748,3705 PREV.1
NetR1_1: R1.1 R3.2 U1.5 | length 436.4
  Bottom Layer w10: U1.5 2140,1075 2145,1070 R3.2 2285,1165 R1.1
NetR2_1: R2.1 R4.2 U1.3 | length 528.1
  Top Layer w10: R4.2 1400,1120 1405,1125 R2.1
  Bottom Layer w10: R2.1 1452,1123 1743,1123 U1.3
NetR6_1: R6.1 R12.2 U2.6 | length 556.1
  Bottom Layer w10: R6.1 R12.2 1280,1655 1630,1655 U2.6
NetR7_1: R7.1 R13.2 U3.6 | length 750.6
  Top Layer w10: R13.2 2690,1730 R7.1
  Bottom Layer w10: U3.6 2587,1583 2743,1583 R7.1
NetR8_2: R8.2 U2.5 | length 389.8
  Bottom Layer w10: R8.2 1600,1540 1615,1540 U2.5
NetR9_2: R9.2 U3.5 | length 338.3
  Top Layer w10: U3.5 2455,1510 R9.2
NetR12_1: R12.1 U2.1 U2.2 | length 235.4
  Top Layer w10: U2.2 U2.1
  Bottom Layer w10: R12.1 1280,1905 U2.1
NetR13_1: R13.1 U3.1 U3.2 | length 711.6
  Top Layer w10: U3.2 U3.1
  Bottom Layer w10: U3.2 2205,1765 2555,1765 R13.1
NetR16_2: R16.2 R25.1 U4.1 U4.5 | length 1355.1
  Top Layer w10: R16.2 R25.1 1628,2442 1628,2778 U4.5
  Bottom Layer w10: U4.1 1444.53,3065.47 1444.53,2930 1400,2885.47 1370.94,2885.47 1335.47,2850 1335.47,2810 1360,2785.47 1635.47,2785.47 U4.5
NetR18_2: R18.2 R27.1 U5.1 U5.5 | length 1596.9
  Top Layer w10: U5.5 2403,2778 2403,2447 R27.1
  Bottom Layer w10: U5.1 2200,3085 2580,3085 2609,3056 2609,2984 U5.5 ; R18.2 2265,2300 2355,2390 R27.1
NetR21_2: R21.2 U4.3 | length 332
  Bottom Layer w10: R21.2 1305.47,3074.53 1400,3074.53 1424.53,3050 1424.53,2974.53 U4.3
NetR22_2: R22.2 U5.3 | length 239.7
  Top Layer w10: R22.2 2035,3050 U5.3
NetR24_2: R24.2 Treble.3 | length 3316.8
  Top Layer w10: v1(3637,2305) 3637,2600.7 Treble.3
  Bottom Layer w10: R24.2 1306,2279 1239,2279 1200,2318 1200,2353.56 1221.44,2375 1309.44,2375 1337,2347.44 1417.56,2347.44 1508,2257 2184,2257 2203,2276 2274,2276 2343,2345 2574,2345 2647,2272 3420,2272 3507.37,2359.37 3582.63,2359.37 v1(3637,2305)
NetR25_2: R25.2 Treble.1 | length 2549.6
  Bottom Layer w10: R25.2 1442.56,2390 1485.56,2347 2219,2347 2324,2452 2507,2452 2667,2292 3397.38,2292 3484.75,2379.37 3660.63,2379.37 Treble.1
NetR29_2: R29.2 R30.1 | length 336.4
  Bottom Layer w10: R29.2 753.74,2995 R30.1
NetR31_2: R31.2 R32.1 | length 341.4
  Bottom Layer w10: R31.2 748.74,2795 R32.1
OUT_L: C32.1 J.2 P3.6 R5.1 | length 2011.1
  Top Layer w10: P3.6 148,2285 148,2341 169.53,2362.53 169.53,2510.47 80.47,2599.53 80.47,2843.47 97,2860 200,2860 275,2935 275,3375 J.2
  Bottom Layer w10: J.2 785.1,3375 R5.1 848.87,3365 C32.1
OUT_R: C33.1 J.3 P3.7 R14.1 | length 2153.8
  Top Layer w10: P3.7 40,2470 40,3629 160.02,3749.02 J.3
  Bottom Layer w10: J.3 578,3749.02 588.98,3760 R14.1 725,3735 C33.1
SAI_FS: P4.1 U6.CN10_37 U7.5 U7.7 | length 4757.2
  Top Layer w10: v1(1763,389) 1793,419 1861,419 1893,451 1893,663.98 1873,683.98 ; U7.7 1860.8,632.8 1873,645 1873,683.98 ; P4.1 1845,934 1781,870 1781,695 1792.02,683.98 U7.5 1873,683.98
  Bottom Layer w10: v1(1763,389) 1763,353 1831,285 3069.41,285 U6.CN10_37
SAI_SCLK: P4.2 U6.CN10_25 U7.3 | length 5916.3
  Top Layer w10: P4.2 1790,3445 1882,3445 1925,3402 1925,3056 2101,2880 2101,2080 2277,1904 2277,1313 2300,1290 2480,1290 2625,1145 2625,608 2658,575 2688,575 2800,687 2894,687 ; U7.3 1898.59,735.16 1933,700.75 1933,393.66 1918.75,379.41 1918.75,189.37 1946.12,162 2118.51,162 2239.51,283 2580,283 2610,313 2610,403 2894,687 ; U6.CN10_25 2972.59,687 2894,687
SAI_SD_A: P4.4 U6.CN7_36 U7.4 | length 5436.2
  Top Layer w10: U6.CN7_36 967.41,187 1340,187 1385,232 1385,799 ; P4.4 1490,3455 1420,3455 1400,3435 1400,3301 1448,3253 1448,933 1385,870 1385,799 ; U7.4 1887.43,709.57 1913,684 1913,433.75 1869.18,389.93 1833.93,389.93 1792.07,348.07 1643.93,348.07 1577,415 1577,797 1520,854 1440,854 1385,799
SAI_SD_B: P4.5 U6.CN10_21 U7.6 | length 4477.7
  Top Layer w10: P4.5 1542,3303 1542,1175 1590,1127 1720,1127 1743,1104 ; v1(1750,1019) 1750,1097 1743,1104 ; U7.6 1778.61,658.39 1743,694 1743,1104
  Bottom Layer w10: v1(1750,1019) 3097,1019 3097,1034.41 U6.CN10_21
TONE_OUT_L: C32.2 U4.6 U4.7 | length 2469.8
  Top Layer w10: U4.6 U4.7
  Bottom Layer w10: C32.2 999,3426 999,3335 959,3295 391,3295 351,3255 351,3165 364.62,3151.38 412.38,3151.38 494,3233 1477,3233 U4.7
TONE_OUT_R: C33.2 U5.6 U5.7 | length 4221
  Top Layer w10: U5.6 U5.7
  Bottom Layer w10: C33.2 904,3689 99,3689 80,3670 80,3185 100,3165 181,3165 398,2948 1000,2948 1238,3186 1439,3186 1640,2985 1701,2985 1780,3064 1957,3064 2036,2985 2200,2985 2245,3030 U5.7
TREBLE_POT_IN: R26.2 Treble.6 | length 2335
  Bottom Layer w10: R26.2 2223.56,2205 2270.56,2252 3488,2252 3549,2191 3760,2191 3810,2241 3810,2511 3622.3,2698.7 Treble.6
TREBLE_POT_OUT: R27.2 Treble.4 | length 2122.7
  Bottom Layer w10: R27.2 2242,2472 2562,2472 2641,2393 2857,2393 2863.37,2399.37 3765.63,2399.37 3790,2375 3790,2255 3765,2230 3613.15,2230 Treble.4
TREBLE_POT_WIPER: C18.1 C19.1 Treble.5 | length 892
  Top Layer w10: v1(3375,2346) 3484,2455 3484,2501.85 Treble.5
  Bottom Layer w10: C19.1 2833,2335 2872,2374 2991,2374 C18.1 3041,2346 v1(3375,2346)
V_ADC: DSP.2 P5.3 U6.CN7_30 | length 6017.4
  Top Layer w10: U6.CN7_30 866,680.41 866,2210 776.38,2299.62 776.38,3041.38 882,3147 882,3445 1121.53,3684.53 1370,3684.53 1389.53,3665 1389.53,3615 1409.53,3595 1600,3595 P5.3
  Bottom Layer w10: P5.3 1730,3555 3651.85,3555 DSP.2
VBIAS_L: P5.4 R8.1 R10.1 R21.1 U1.1 U1.2 | length 3608.8
  Top Layer w10: P5.4 1589.53,3684.53 1689,3684.53 1690,3683.53 1690,3219 1756,3153 1756,2855 ; v1(1585,2668) 1585,2820 1640,2875 1736,2875 1756,2855 ; R8.1 R10.1 ; U1.2 U1.1 1756,1414 1756,2855
  Bottom Layer w10: R21.1 1260,2775 1310,2725 1528,2725 v1(1585,2668) ; R8.1 1760,1340 U1.1
VBIAS_R: P5.5 R9.1 R11.1 R22.1 U1.6 U1.7 | length 3920.1
  Top Layer w10: v1(1885,3241) 1885,2970 R22.1 2035,1335 U1.7 U1.6 ; R9.1 R11.1
  Bottom Layer w10: P5.5 1260,3455 1120,3455 1100,3435 1100,3375 1153,3322 1804,3322 v1(1885,3241) ; U1.7 2139,1275 2178,1236 2280,1236 2320,1276 R9.1
VOL_IN_L: P3.4 R23.2 Volume.6 | length 6464.2
  Top Layer w10: P3.4 80,2040 80,643 111,612 185,612 185,120 240,65 320,65 385,130 385,200 479,294 v1(479,875)
  Bottom Layer w10: v1(479,875) 572,782 1198,782 1285,695 ; R23.2 1285,695 ; Volume.6 3538.15,784 2706,784 2675.62,753.62 2189.24,753.62 2166.03,730.42 2051.59,730.42 2028.38,753.62 1343.62,753.62 1285,695
VOL_IN_R: P3.5 R35.2 Volume.3 | length 5516.2
  Top Layer w10: v1(1015,2066) 973,2024 973,1211 1000,1184 1155,1184 1193.62,1145.38 1193.62,578.62 R35.2
  Bottom Layer w10: P3.5 896,2185 v1(1015,2066) ; R35.2 1222.56,482.44 1347.56,482.44 1398.74,533.62 2087.38,533.62 2090.5,536.73 2154.76,536.73 2170.5,521 2793,521 2855,583 3374,583 3445,512 3574,512 3735,673 Volume.3
VOL_OUT_L: R6.2 R15.1 R24.1 U2.7 Volume.4 | length 4314.9
  Top Layer w10: v1(1639,1965) 1639,2069 R15.1 ; U2.7 1725,1850 1725,2065 R15.1 ; R24.1 R15.1
  Bottom Layer w10: R6.2 1198,1973 1631,1973 v1(1639,1965) ; U2.7 1726,1805 1769.62,1848.62 1834,1848.62 2022.62,1660 2180,1660 2452,1388 2671,1388 2718,1341 2967,1341 3024,1284 3365,1284 3810,839 3810,535 3769,494 3662.15,494 Volume.4
VOL_OUT_R: R7.2 R17.1 R26.1 U3.7 Volume.1 | length 3032.3
  Top Layer w10: U3.7 2504,1864 2504,2066 R17.1 R26.1
  Bottom Layer w10: U3.7 2489,1849 2709,1849 R7.2 2790,1724 2873,1641 3000,1641 3056,1585 3255,1585 3400,1440 3400,1279 3830,849 3830,465 Volume.1
VOL_POT_WIPER: C7.P Volume.2 | length 4718.2
  Bottom Layer w10: C7.P 343,1997.41 343,1613 372,1584 840,1584 960,1464 960,1325 1000,1285 1409,1285 1505,1381 1687,1381 1741,1435 2206,1435 2249,1392 2375,1392 2720,1047 3042,1047 3075,1080 3525,1080 3790,815 3790,621.85 Volume.2
pads on no net: BT.5 DSP.4 DSP.5 DSP.6 NEXT.3 NEXT.4 P4.6 PAUSE.3 PAUSE.4 PREV.3 PREV.4 U6. U6.CN5_1 U6.CN5_2 U6.CN5_3 U6.CN5_4 U6.CN5_5 U6.CN5_6 U6.CN5_7 U6.CN5_8 U6.CN5_9 U6.CN5_10 U6.CN6_1 U6.CN6_2 U6.CN6_3 U6.CN6_4 U6.CN6_5 U6.CN6_6 U6.CN6_7 U6.CN6_8 U6.CN7_1 U6.CN7_2 U6.CN7_3 U6.CN7_4 U6.CN7_5 U6.CN7_6 U6.CN7_7 U6.CN7_8 U6.CN7_9 U6.CN7_10 U6.CN7_11 U6.CN7_12 U6.CN7_13 U6.CN7_14 U6.CN7_15 U6.CN7_17 U6.CN7_18 U6.CN7_19 U6.CN7_20 U6.CN7_23 U6.CN7_24 U6.CN7_25 U6.CN7_26 U6.CN7_27 U6.CN7_28 U6.CN7_29 U6.CN7_31 U6.CN7_32 U6.CN7_33 U6.CN7_34 U6.CN7_35 U6.CN7_37 U6.CN7_38 U6.CN8_1 U6.CN8_2 U6.CN8_3 U6.CN8_4 U6.CN8_5 U6.CN8_6 U6.CN9_1 U6.CN9_2 U6.CN9_3 U6.CN9_4 U6.CN9_5 U6.CN9_6 U6.CN9_7 U6.CN9_8 U6.CN10_1 U6.CN10_2 U6.CN10_3 U6.CN10_4 U6.CN10_5 U6.CN10_6 U6.CN10_7 U6.CN10_8 U6.CN10_9 U6.CN10_10 U6.CN10_11 U6.CN10_12 U6.CN10_13 U6.CN10_14 U6.CN10_15 U6.CN10_16 U6.CN10_18 U6.CN10_19 U6.CN10_20 U6.CN10_22 U6.CN10_24 U6.CN10_26 U6.CN10_27 U6.CN10_28 U6.CN10_29 U6.CN10_30 U6.CN10_31 U6.CN10_32 U6.CN10_33 U6.CN10_34 U6.CN10_35 U6.CN10_36 U6.CN10_38 U7.2 U7.9 U7.10 U7.17 U7.18 U7.26

## Polygon pours and split planes (outlines as drawn)
GND on Bottom Layer "5V_L02_P-001" (hatched 45Degree grid 20 track 8, pour order 3): 0,3830 4075,3830 4075,0 0,0
3V3 on Top Layer "5V_L02_P-001" (hatched 45Degree grid 20 track 8, pour order 2): 0,3830 4075,3830 4075,0 0,0

## Keep-outs
Top Layer:
  lines w10: 0,0 0,3805 0,3830 450,3830 1170,3830 3000.5,3830 4075,3830 4075,3815 4075,2565 4075,0 1150,0 0,0

## Silkscreen, mask and mechanical layers (free items; w line width, h text height)
Top Overlay:
  text ">" at 310,50 h40 r270
  text "|" at 330,50 h40
  text "|" at 350,50 h40 r90
  text ">" at 410,50 h40 r270
  text "|" at 430,50 h40
  text "|" at 450,50 h40 r90
  text "STM32F446RET6 Nucelo-64" at 1120,50 h40
  text "9V" at 90,45 h40
  text "5V" at 195,45 h40
  text "STM32 Bluetooth DSP Backpack 1.0" at 2510,21.66 h50
Mechanical 1:
  the board outline again, w47.24